# Altium PCB bdcmc25.PcbDoc (part 1 of 4)
Units mil, origin at the board's own origin, x right, y up, seen from the top; angles counter-clockwise.
Board outline 7750 x 2750 mil, 4 copper layers (Layer 1, Layer 2 (GND), Layer 3 (GND), Layer 4), stack 23.756 mil thick; 330 components, 156 nets, 997 pads, 1122 vias.
Unrouted connection lines stored in the file: 39.
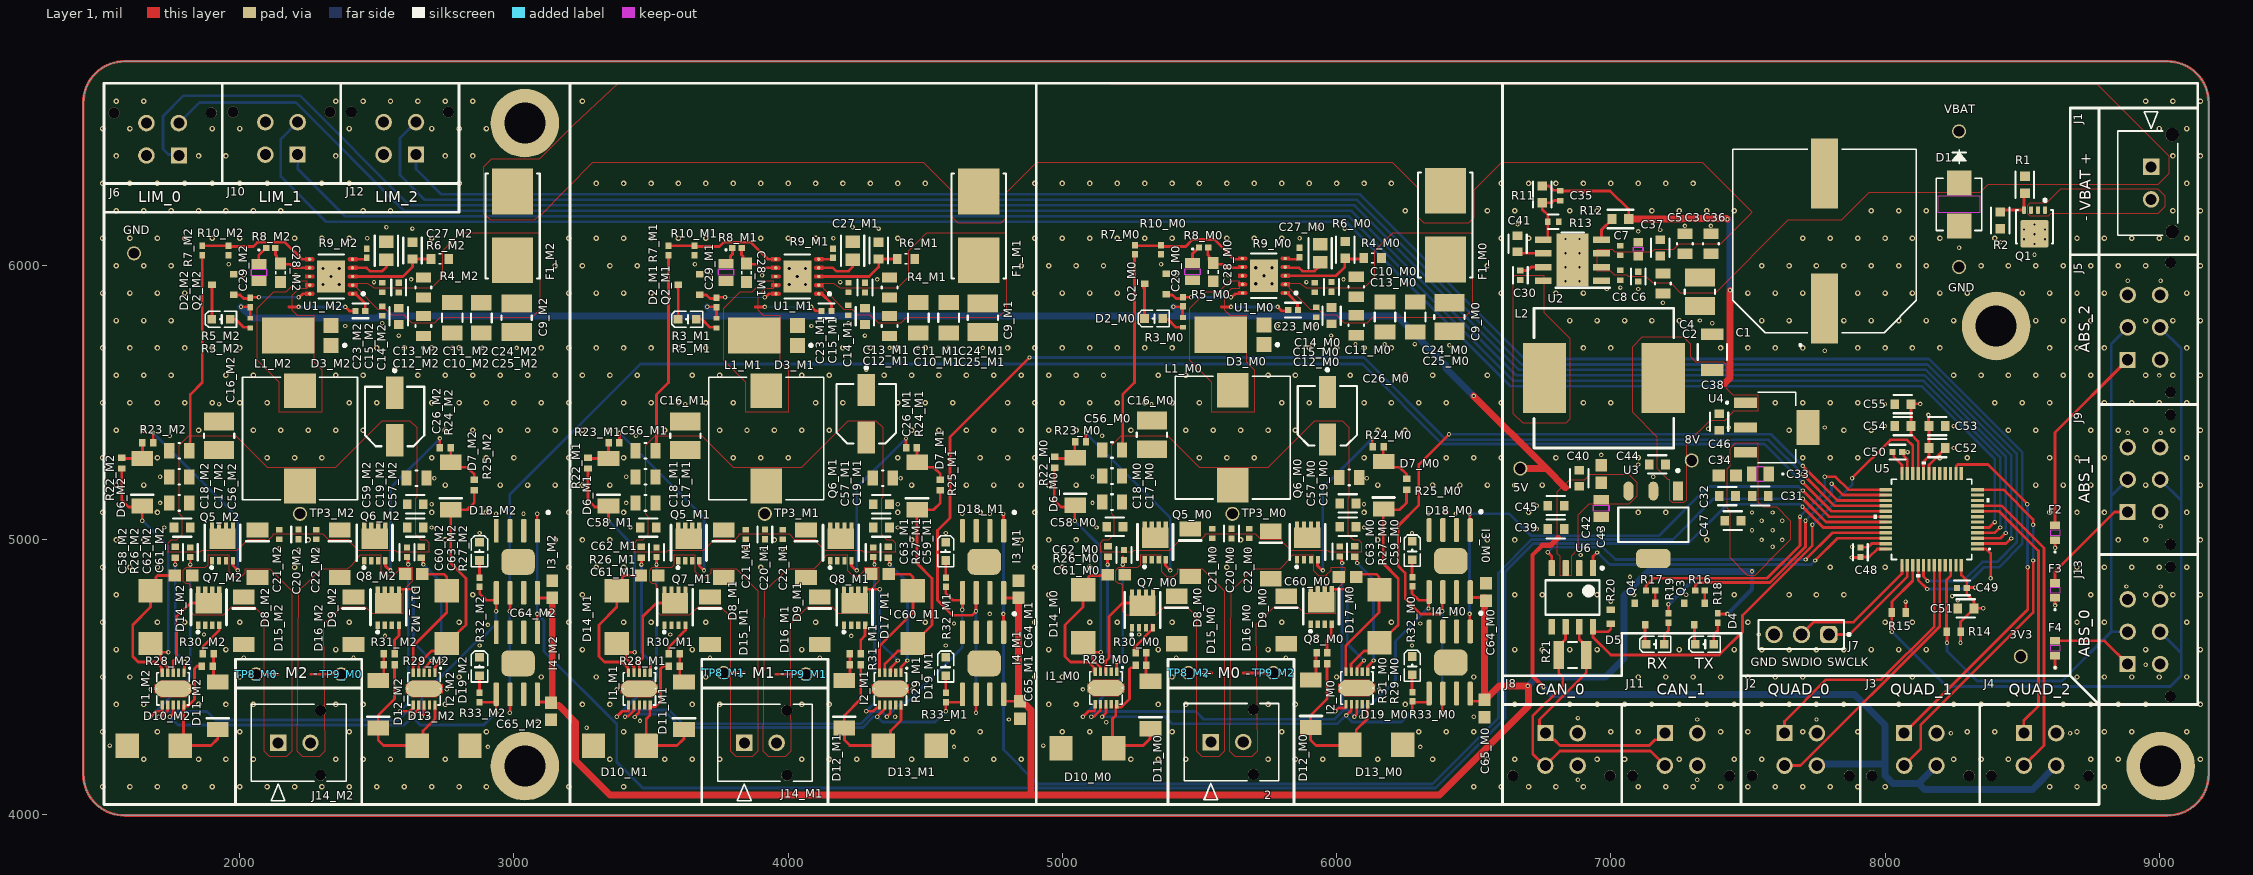
[diagram p0: Layer 1 view]
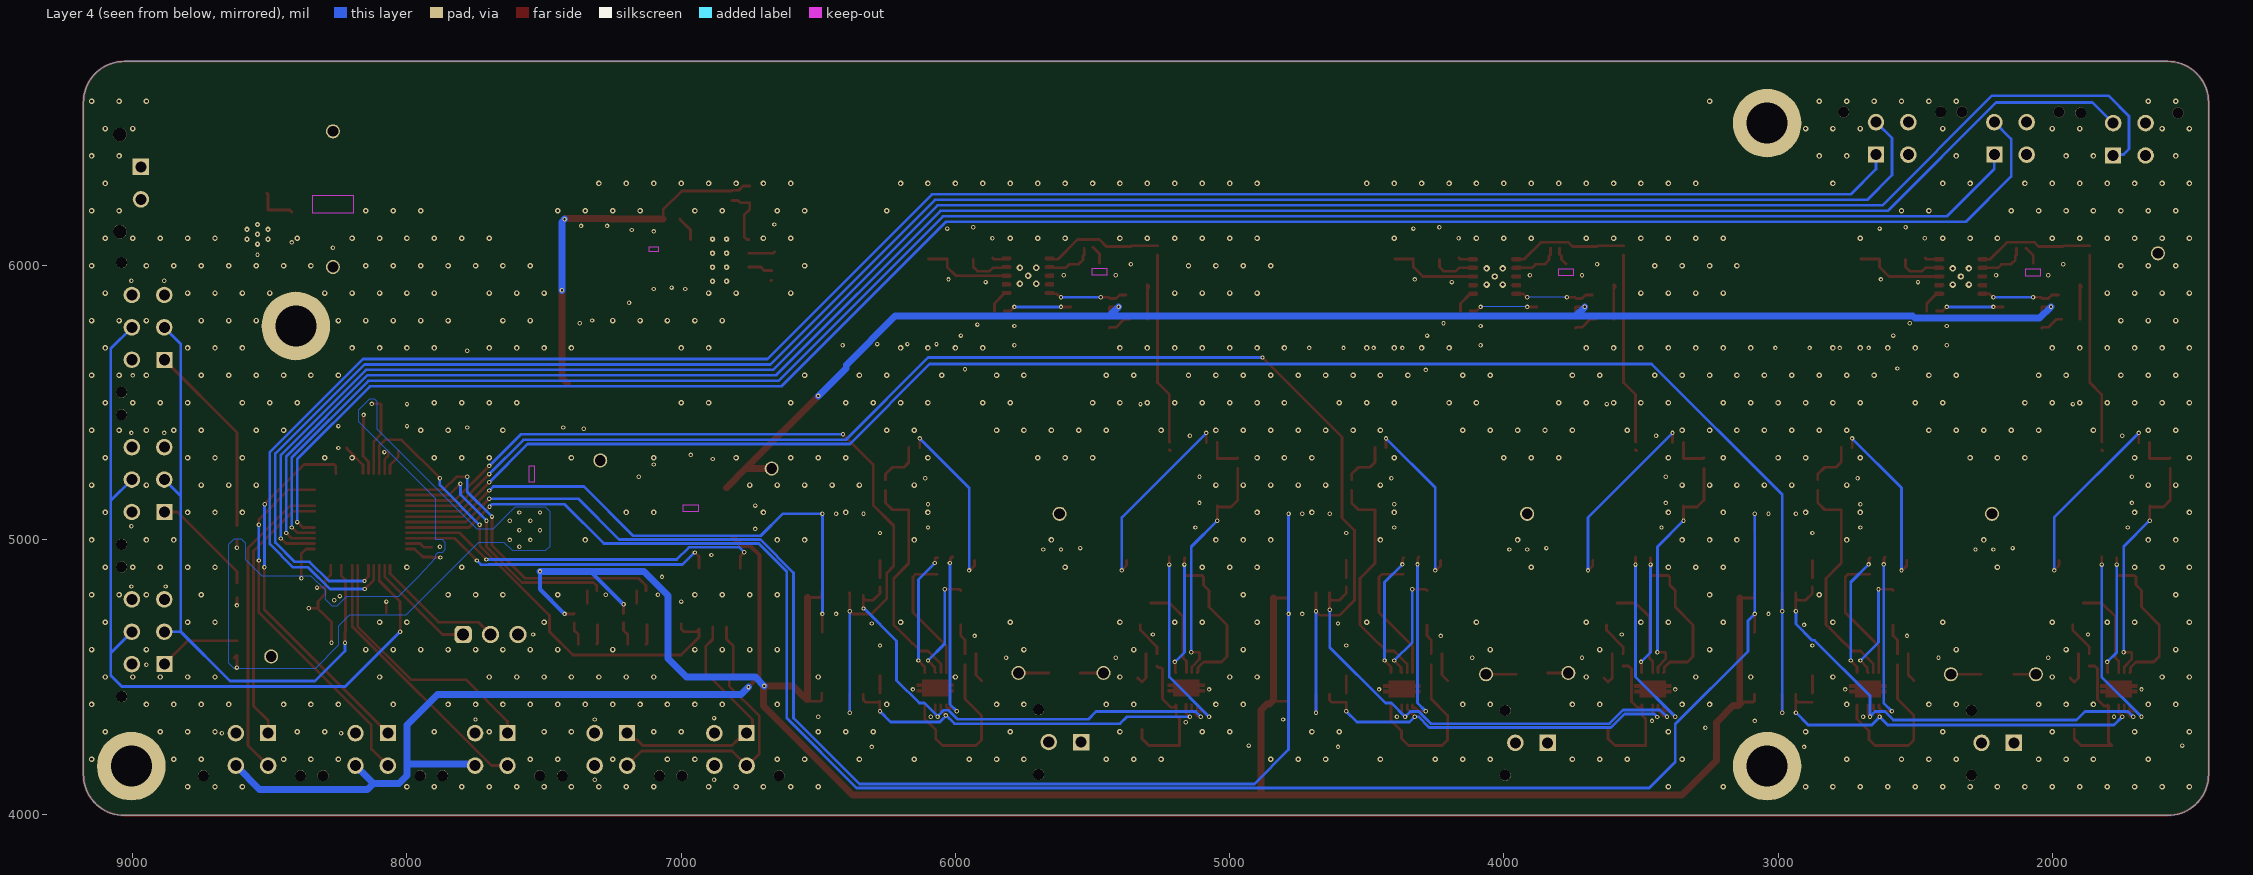
[diagram p1: Layer 4 view, seen from below]
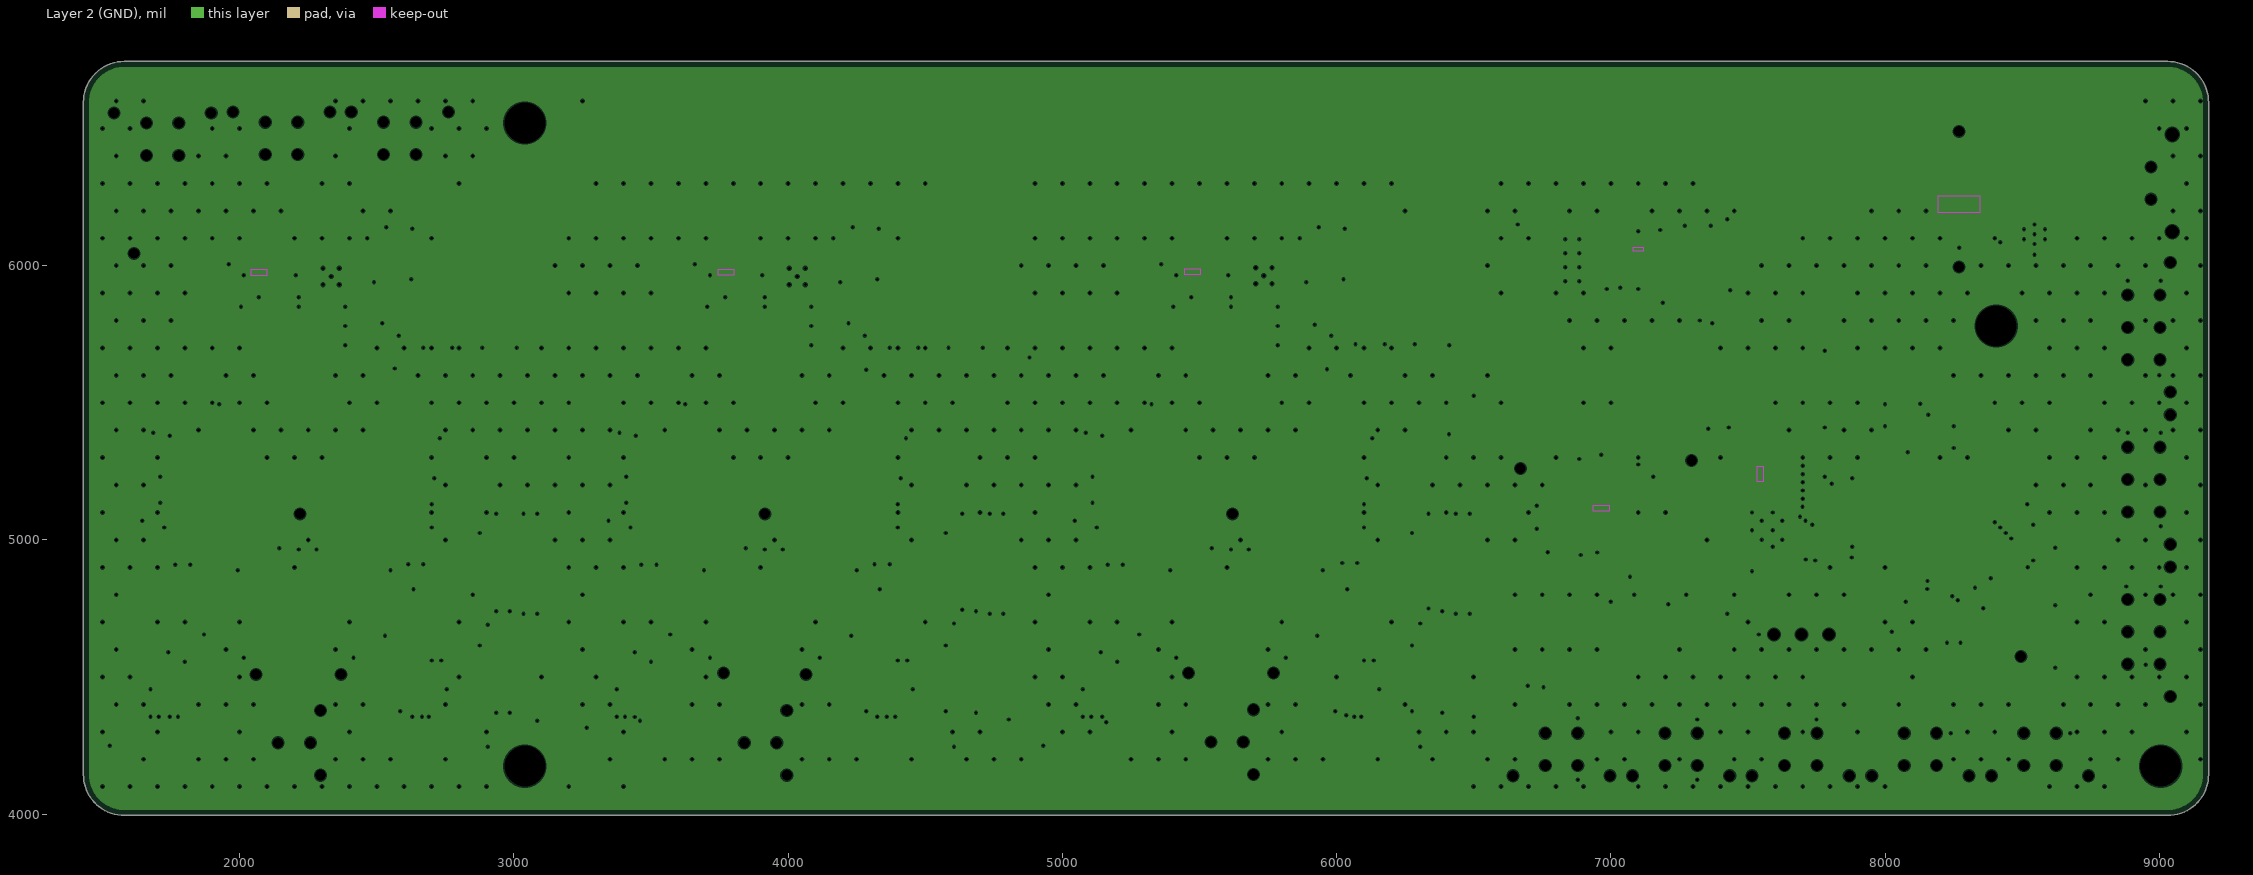
[diagram p2: Layer 2 (GND), clearances drawn from the general rule]
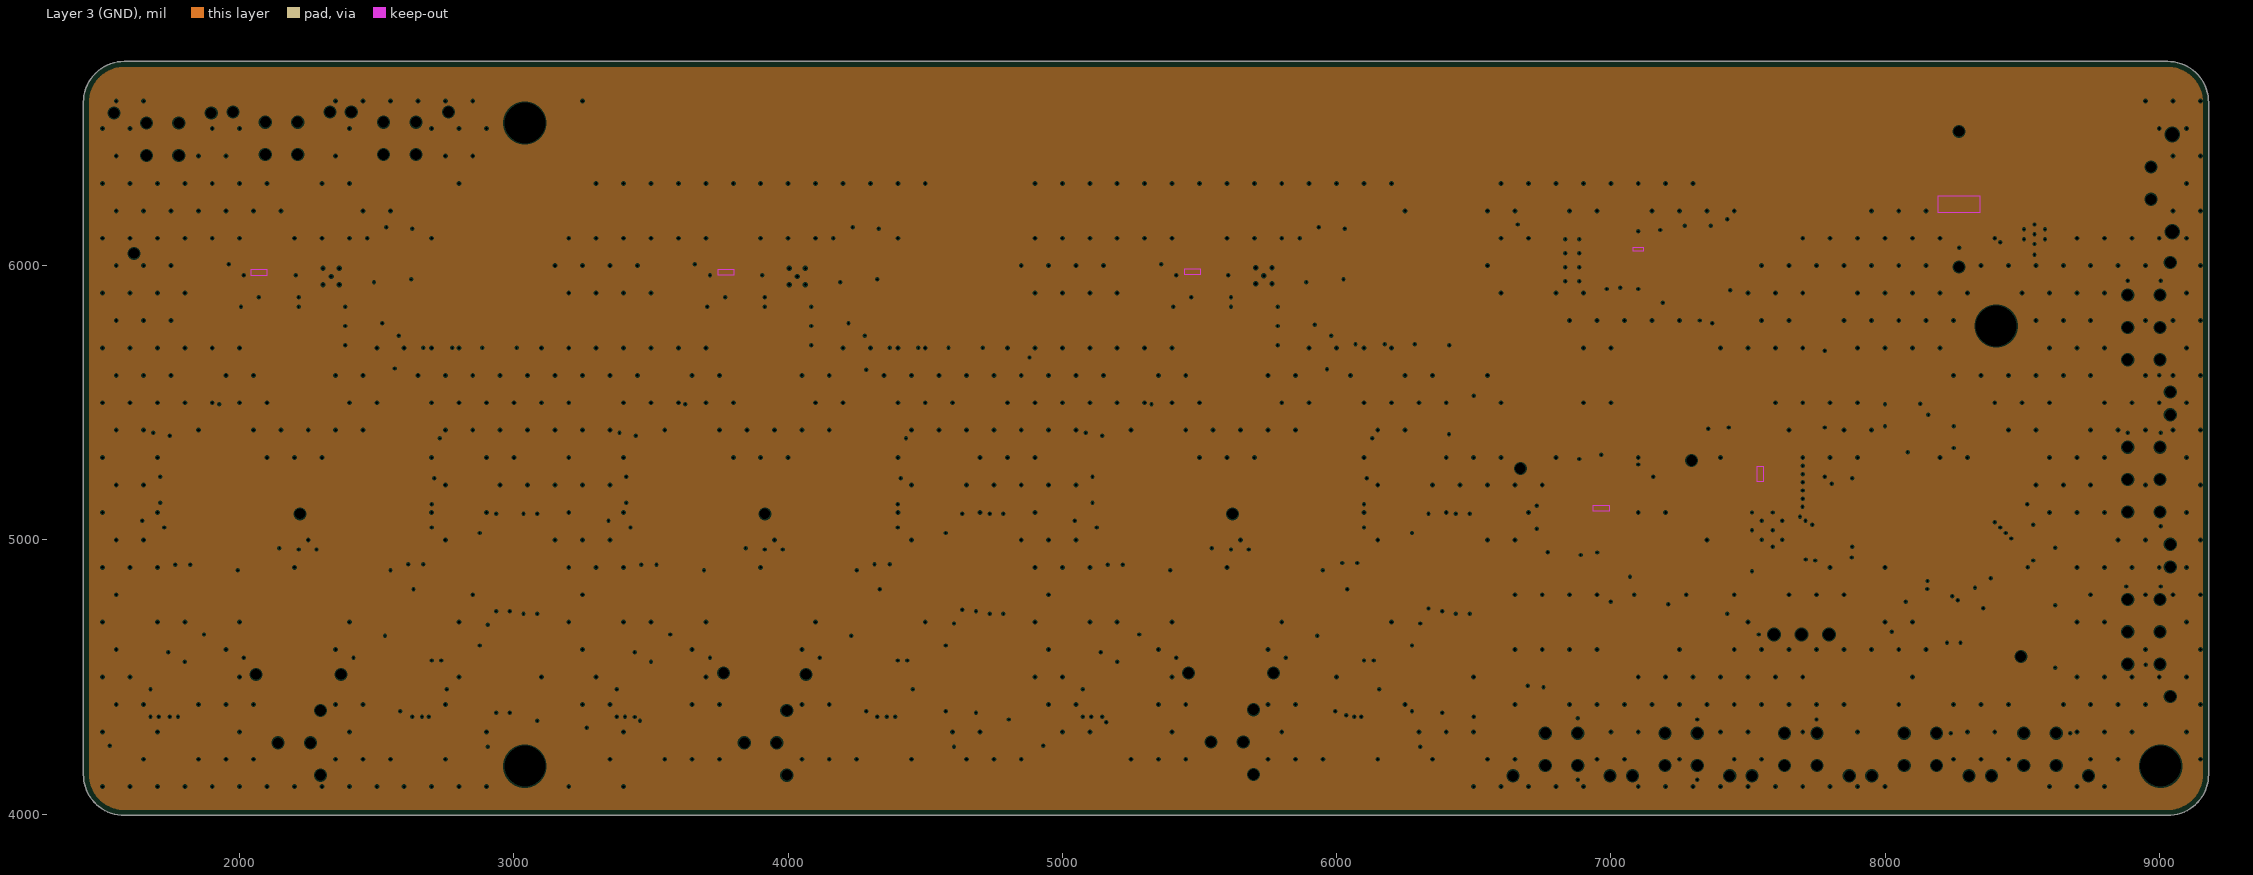
[diagram p3: Layer 3 (GND), clearances drawn from the general rule]
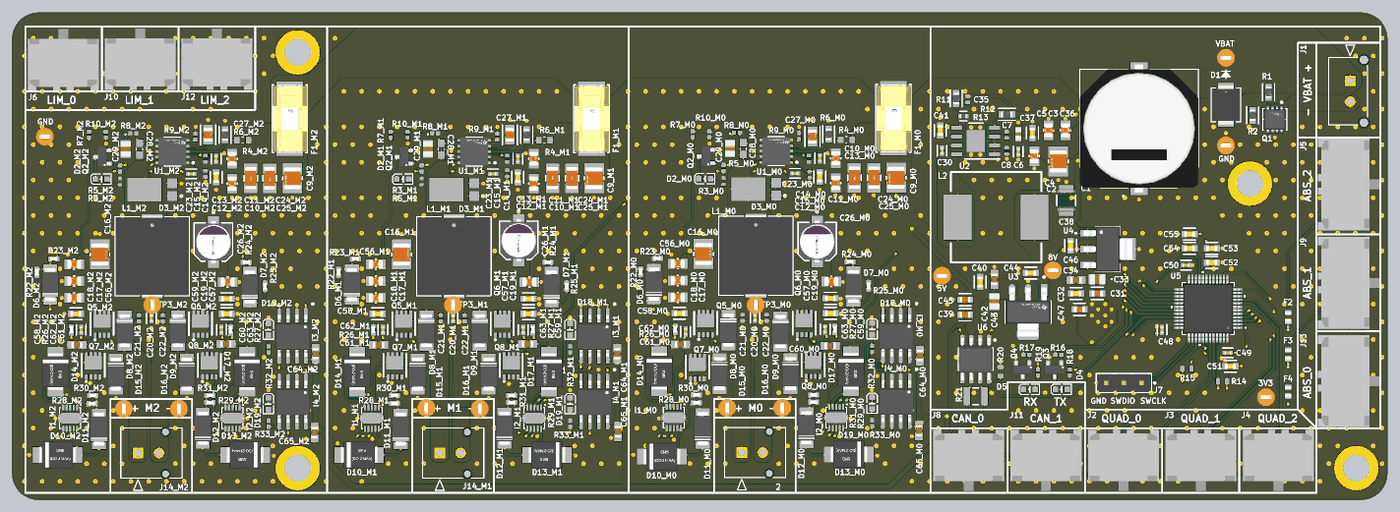
[diagram p6: 3D render of the assembled board from above, using the file's embedded part models]

## Layer stack, top to bottom
Top Solder: solder mask 0.4, Solder Resist, Dk 3.5
Layer 1: signal copper 1.4
Dielectric 2: prepreg 2.8, PP-006, Dk 4.1
Layer 2 (GND): plane copper 1.378
Dielectric 1: dielectric 12.6, FR-4, Dk 4.8
Layer 3 (GND): plane copper 1.378
Dielectric 3: prepreg 2.8, PP-006, Dk 4.1
Layer 4: signal copper 1.4
Bottom Solder: solder mask 0.4, Solder Resist, Dk 3.5

## Board outline
1580,3995 cw(c1580,4145) 1430,4145 1430,6595 cw(c1580,6595) 1580,6745 9030,6745 cw(c9030,6595) 9180,6595 9180,4145 cw(c9030,4145) 9030,3995

## Design rules (kind name [scope] priority, off if disabled: settings)
BoardOutlineClearance [All] p1: gap=7.87 ignorepadtopadclearanceinfootprint=FALSE
Clearance [All] p1: gap=4 ignorepadtopadclearanceinfootprint=FALSE except(5: Arc-Via Track-Via SMDPad-Via THPad-Via Via-Via Via-Fill Via-Poly Via-Region Via-Text; 9.84: Arc-Hole Track-Hole SMDPad-Hole THPad-Hole Via-Hole Fill-Hole Poly-Hole Region-Hole Text-Hole)
ComponentClearance [All] p1: gap=4 collisioncheckmode=3 verticalgap=4 showdistances=TRUE
DiffPairsRouting [All] p1: maxlimit=4 minlimit=4 mostfreqgap=4 toplayer_minwidth=4 toplayer_maxwidth=71497.94 toplayer_prefwidth=4 bottomlayer_minwidth=4 bottomlayer_maxwidth=71497.94 bottomlayer_prefwidth=4 maxuncoupledlength=500
Height [All] p1: minheight=0 maxheight=71497.94 prefheight=500
HoleSize [All] p1: absolutevalues=TRUE maxlimit=248.03 minlimit=7.87 maxpercent=80.000 minpercent=20.000
HoleToHoleClearance [All] p1: gap=9.84 allowstackedmicrovias=FALSE
MinimumAnnularRing [All] p1: minimumring=3
MinimumSolderMaskSliver [All] p1: minsoldermaskwidth=0
PlaneClearance [All] p1: clearance=4
PlaneConnect PlaneConnectPowerPads [InPadClass('PowerPads')] p1: planeconnectstyle=Direct reliefexpansion=20 reliefentries=4 reliefconductorwidth=10 reliefairgap=10
PlaneConnect [All] p2: pad.planeconnectstyle=Relief pad.reliefexpansion=11.81 pad.reliefentries=4 pad.reliefconductorwidth=4 pad.reliefairgap=4 via.planeconnectstyle=Direct via.reliefexpansion=11.81 via.reliefentries=4 via.reliefconductorwidth=5 via.reliefairgap=5
PolygonConnect PolygonConnectPowerPads [All vs (InPadClass('PowerPads'))] p1: connectstyle=Direct reliefconductorwidth=10 reliefentries=4 polygonreliefangle="90 Angle" airgapwidth=10
PolygonConnect [All] p2: thpad.connectstyle=Relief thpad.reliefconductorwidth=4 thpad.reliefentries=4 thpad.polygonreliefangle="90 Angle" thpad.airgapwidth=4 smdpad.connectstyle=Relief smdpad.reliefconductorwidth=4 smdpad.reliefentries=4 smdpad.polygonreliefangle="90 Angle" smdpad.airgapwidth=4 via.connectstyle=Direct via.reliefconductorwidth=5 via.reliefentries=4 via.polygonreliefangle="90 Angle" via.airgapwidth=5
RoutingVias [All] p1: holewidth=7.87 width=17.72 viastyle="Through Hole" minholewidth=7.87 minwidth=17.72 maxholewidth=248.03 maxwidth=257.87
SilkToSilkClearance [All] p1: silktosilkclearance=0
SilkToSolderMaskClearance [IsPad] p1: minsilkscreentomaskgap=4 clearancetoexposedcopper=TRUE
SolderMaskExpansion [All] p1: expansion=2.95 istentingtop=FALSE
Width [All] p1: maxlimit=71497.94 minlimit=10 preferedwidth=10 minimp=50.000000 maximp=50.000000 favimp=50.000000
20 further rules are at their usual default settings.

## Classes and differential pairs
channel class Motor_Control: M0 M1 M2
channel class 12V_Buck_Motor: M0 M1 M2
component class M2: C56_M2 C57_M2 C58_M2 C59_M2 C60_M2 C61_M2 C62_M2 C63_M2 C64_M2 C65_M2 D6_M2 D7_M2 D8_M2 D9_M2 D10_M2 D11_M2 D12_M2 D13_M2 D14_M2 D15_M2 D16_M2 D17_M2 D18_M2 D19_M2 I1_M2 I2_M2 I3_M2 I4_M2 J14_M2 Q5_M2 Q6_M2 Q7_M2 Q8_M2 R22_M2 R23_M2 R24_M2 R25_M2 R26_M2 R27_M2 R28_M2 R29_M2 R30_M2 R31_M2 R32_M2 R33_M2
component class M1: C56_M1 C57_M1 C58_M1 C59_M1 C60_M1 C61_M1 C62_M1 C63_M1 C64_M1 C65_M1 D6_M1 D7_M1 D8_M1 D9_M1 D10_M1 D11_M1 D12_M1 D13_M1 D14_M1 D15_M1 D16_M1 D17_M1 D18_M1 D19_M1 I1_M1 I2_M1 I3_M1 I4_M1 J14_M1 Q5_M1 Q6_M1 Q7_M1 Q8_M1 R22_M1 R23_M1 R24_M1 R25_M1 R26_M1 R27_M1 R28_M1 R29_M1 R30_M1 R31_M1 R32_M1 R33_M1
component class M0: C56_M0 C57_M0 C58_M0 C59_M0 C60_M0 C61_M0 C62_M0 C63_M0 C64_M0 C65_M0 D6_M0 D7_M0 D8_M0 D9_M0 D10_M0 D11_M0 D12_M0 D13_M0 D14_M0 D15_M0 D16_M0 D17_M0 D18_M0 D19_M0 I1_M0 I2_M0 I3_M0 I4_M0 Q5_M0 Q6_M0 Q7_M0 Q8_M0 R22_M0 R23_M0 R24_M0 R25_M0 R26_M0 R27_M0 R28_M0 R29_M0 R30_M0 R31_M0 R32_M0 R33_M0
component class "Input Power": C1 C2 C3 C4 C5 C6 C7 C8 D1 GND J1 Q1 R1 R2 VBAT
component class Designator: C48 C49 C50 C51 C52 C53 C54 C55 D4 D5 F2 F3 F4 GND J2 J3 J4 J5 J6 J7 J8 J9 J10 J11 J12 J13 Q3 Q4 R14 R15 R16 R17 R18 R19 R20 R21 U5 U6

## Components (designator, comment, footprint, x,y, rotation, side; value= is the part's Value field where it differs from the comment)
2 "0430450212" CON_430450212_MOL 5541.51,4262.8 r270 top (schematic designator J14)
3V3 "5003" TEST-POINT-0001 8495,4575 r0 top (schematic designator TP6)
5V "5003" TEST-POINT-0001 6670,5260 r0 top (schematic designator TP5)
8V "5003" TEST-POINT-0001 7295,5290 r0 top (schematic designator TP4)
C1 "EEETK2A101AM" CAP_EEETK2A101AM 7780,6090 r90 top
C2 "CL32B106KBJNNNE" FP-CL32-IPC_B 7325,5905 r270 top
C3 "CC0805KKX7R9BB105" FP-CC0805-0_85-MFG 7270,6080 r270 top value="1 uF"
C4 "CC0805KRX7R9BB104" FP-CC0805-0_85-MFG 7190,5935 r90 top value="100 nF"
C5 "CC0603KPX7R9BB103" FP-CC0603-DA-MFG 7180,6065 r270 top value="10 nF"
C6 "CC0402KRX7R9BB102" FP-CC0402-IPC_B 7100,5960 r90 top value="1.0 nF"
C7 "CC0402JRNPO9BN101" CAPC1005X55N 7035,6055 r270 top
C8 "CC0402JRNPO9BN100" CAPC1005X55N 7035,5965 r90 top
C9_M0 "CL32B106KBJNNNE" FP-CL32-IPC_B 6411.51,5812.8 r270 top (schematic designator C9)
C9_M1 "CL32B106KBJNNNE" FP-CL32-IPC_B 4710.12,5810 r270 top (schematic designator C9)
C9_M2 "CL32B106KBJNNNE" FP-CL32-IPC_B 3010,5810 r270 top (schematic designator C9)
C10_M0 "CC0805KKX7R9BB105" FP-CC0805-0_85-MFG 6071.51,5922.8 r270 top value="1 uF" (schematic designator C10)
C10_M1 "CC0805KKX7R9BB105" FP-CC0805-0_85-MFG 4370.12,5920 r270 top value="1 uF" (schematic designator C10)
C10_M2 "CC0805KKX7R9BB105" FP-CC0805-0_85-MFG 2670,5920 r270 top value="1 uF" (schematic designator C10)
C11_M0 "CC0805KRX7R9BB104" FP-CC0805-0_85-MFG 6071.51,5782.8 r90 top value="100 nF" (schematic designator C11)
C11_M1 "CC0805KRX7R9BB104" FP-CC0805-0_85-MFG 4370.12,5780 r90 top value="100 nF" (schematic designator C11)
C11_M2 "CC0805KRX7R9BB104" FP-CC0805-0_85-MFG 2670,5780 r90 top value="100 nF" (schematic designator C11)
C12_M0 "CC0603KPX7R9BB103" FP-CC0603-DA-MFG 5981.51,5817.8 r90 top value="10 nF" (schematic designator C12)
C12_M1 "CC0603KPX7R9BB103" FP-CC0603-DA-MFG 4280.12,5815 r90 top value="10 nF" (schematic designator C12)
C12_M2 "CC0603KPX7R9BB103" FP-CC0603-DA-MFG 2580,5815 r90 top value="10 nF" (schematic designator C12)
C13_M0 "CC0402KRX7R9BB102" FP-CC0402-IPC_B 5981.51,5922.8 r270 top value="1.0 nF" (schematic designator C13)
C13_M1 "CC0402KRX7R9BB102" FP-CC0402-IPC_B 4280.12,5920 r270 top value="1.0 nF" (schematic designator C13)
C13_M2 "CC0402KRX7R9BB102" FP-CC0402-IPC_B 2580,5920 r270 top value="1.0 nF" (schematic designator C13)
C14_M0 "CC0402JRNPO9BN101" CAPC1005X55N 5925,5830 r90 top (schematic designator C14)
C14_M1 "CC0402JRNPO9BN101" CAPC1005X55N 4220,5837.48 r90 top (schematic designator C14)
C14_M2 "CC0402JRNPO9BN101" CAPC1005X55N 2520,5835 r90 top (schematic designator C14)
C15_M0 "CC0402JRNPO9BN100" CAPC1005X55N 5920,5920 r270 top (schematic designator C15)
C15_M1 "CC0402JRNPO9BN100" CAPC1005X55N 4220.12,5920 r270 top (schematic designator C15)
C15_M2 "CC0402JRNPO9BN100" CAPC1005X55N 2520,5920 r270 top (schematic designator C15)
C16_M0 "CL32B106KBJNNNE" FP-CL32-IPC_B 5326.51,5382.8 r90 top (schematic designator C16)
C16_M1 "CL32B106KBJNNNE" FP-CL32-IPC_B 3625.12,5380 r90 top (schematic designator C16)
C16_M2 "CL32B106KBJNNNE" FP-CL32-IPC_B 1925,5380 r90 top (schematic designator C16)
C17_M0 "CC0805KKX7R9BB105" FP-CC0805-0_85-MFG 5181.51,5232.8 r0 top value="1 uF" (schematic designator C17)
C17_M1 "CC0805KKX7R9BB105" FP-CC0805-0_85-MFG 3480.12,5230 r0 top value="1 uF" (schematic designator C17)
C17_M2 "CC0805KKX7R9BB105" FP-CC0805-0_85-MFG 1780,5230 r0 top value="1 uF" (schematic designator C17)
C18_M0 "CC0805KRX7R9BB104" FP-CC0805-0_85-MFG 5181.51,5137.8 r0 top value="100 nF" (schematic designator C18)
C18_M1 "CC0805KRX7R9BB104" FP-CC0805-0_85-MFG 3480.12,5135 r0 top value="100 nF" (schematic designator C18)
C18_M2 "CC0805KRX7R9BB104" FP-CC0805-0_85-MFG 1780,5135 r0 top value="100 nF" (schematic designator C18)
C19_M0 "CC0603KPX7R9BB103" FP-CC0603-DA-MFG 6041.51,5132.8 r180 top value="10 nF" (schematic designator C19)
C19_M1 "CC0603KPX7R9BB103" FP-CC0603-DA-MFG 4340.12,5130 r180 top value="10 nF" (schematic designator C19)
C19_M2 "CC0603KPX7R9BB103" FP-CC0603-DA-MFG 2640,5130 r180 top value="10 nF" (schematic designator C19)
C20_M0 "CC0402KRX7R9BB102" FP-CC0402-IPC_B 5616.51,5022.8 r90 top value="1.0 nF" (schematic designator C20)
C20_M1 "CC0402KRX7R9BB102" FP-CC0402-IPC_B 3915.12,5020 r90 top value="1.0 nF" (schematic designator C20)
C20_M2 "CC0402KRX7R9BB102" FP-CC0402-IPC_B 2215,5020 r90 top value="1.0 nF" (schematic designator C20)
C21_M0 "CC0402JRNPO9BN101" CAPC1005X55N 5546.51,5022.8 r90 top (schematic designator C21)
C21_M1 "CC0402JRNPO9BN101" CAPC1005X55N 3845.12,5020 r90 top (schematic designator C21)
C21_M2 "CC0402JRNPO9BN101" CAPC1005X55N 2145,5020 r90 top (schematic designator C21)
C22_M0 "CC0402JRNPO9BN100" CAPC1005X55N 5681.51,5022.8 r90 top (schematic designator C22)
C22_M1 "CC0402JRNPO9BN100" CAPC1005X55N 3980.12,5020 r90 top (schematic designator C22)
C22_M2 "CC0402JRNPO9BN100" CAPC1005X55N 2280,5020 r90 top (schematic designator C22)
C23_M0 "CC0402KRX7R7BB104" FP-CC0402-IPC_B 5841.51,5837.8 r180 top value="100 nF" (schematic designator C23)
C23_M1 "CC0402KRX7R7BB104" FP-CC0402-IPC_B 4140.12,5835 r180 top value="100 nF" (schematic designator C23)
C23_M2 "CC0402KRX7R7BB104" FP-CC0402-IPC_B 2440,5835 r180 top value="100 nF" (schematic designator C23)
C24_M0 "CC1206KKX7R0BB225" FP-CC1206-0_3-1_9-IPC_B 6286.51,5812.8 r270 top (schematic designator C24)
C24_M1 "CC1206KKX7R0BB225" FP-CC1206-0_3-1_9-IPC_B 4585.12,5810 r270 top (schematic designator C24)
C24_M2 "CC1206KKX7R0BB225" FP-CC1206-0_3-1_9-IPC_B 2881.51,5809.53 r270 top (schematic designator C24)
C25_M0 "CC1206KKX7R0BB225" FP-CC1206-0_3-1_9-IPC_B 6176.51,5812.8 r270 top (schematic designator C25)
C25_M1 "CC1206KKX7R0BB225" FP-CC1206-0_3-1_9-IPC_B 4475.12,5810 r270 top (schematic designator C25)
C25_M2 "CC1206KKX7R0BB225" FP-CC1206-0_3-1_9-IPC_B 2775,5810 r270 top (schematic designator C25)
C26_M0 "16SVPG47M" FP-OS-CON-SMT-B45-MFG 5966.51,5452.8 r270 top (schematic designator C26)
C26_M1 "16SVPG47M" FP-OS-CON-SMT-B45-MFG 4285,5460 r270 top (schematic designator C26)
C26_M2 "16SVPG47M" FP-OS-CON-SMT-B45-MFG 2565,5450 r270 top (schematic designator C26)
C27_M0 "GRM2165C1H272JA01D" FP-GRM216-0_1-IPC_B 5940,6045 r90 top (schematic designator C27)
C27_M1 "GRM2165C1H272JA01D" FP-GRM216-0_1-IPC_B 4235.12,6055 r90 top (schematic designator C27)
C27_M2 "GRM2165C1H272JA01D" FP-GRM216-0_1-IPC_B 2535,6055 r90 top (schematic designator C27)
C28_M0 "CC0603CRNPO0BN6R8" CAPC1608X90 5550,5976.73 r270 top (schematic designator C28)
C28_M1 "CC0603CRNPO0BN6R8" CAPC1608X90 3848.61,5973.94 r270 top (schematic designator C28)
C28_M2 "CC0603CRNPO0BN6R8" CAPC1608X90 2148.49,5973.94 r270 top (schematic designator C28)
C29_M0 "CC0805JRNPO9BN471" CAP_CC0805_YAG-L 5475,5978.27 r270 top (schematic designator C29)
C29_M1 "CC0805JRNPO9BN471" CAP_CC0805_YAG-L 3773.61,5975.47 r270 top (schematic designator C29)
C29_M2 "CC0805JRNPO9BN471" CAP_CC0805_YAG-L 2070,5975 r270 top (schematic designator C29)
C30 "CC0402KRX7R7BB104" FP-CC0402-IPC_B 6670,5965 r270 top value="100 nF"
C31 "CC0603KRX5R6BB106" FP-CC0603-DC-MFG 7545,5160 r0 top
C32 "CC0603KRX7R7BB105" FP-CC0603-DA-MFG 7425,5160 r180 top
C33 "CC0805JRNPO9BN471" CAP_CC0805_YAG-L 7545,5240 r180 top
C34 "CC0603KRX7R0BB104" CAP-0603 7425,5235 r0 top
C35 "CC0402CRNPO9BN5R1" CAPC1005X55N 6815,6255 r270 top
C36 "CC0805KKX5R9BB475" FP-CC0805-0_85-MFG 7365,6080 r90 top value="4.7 uF"
C37 "CC0603JRX7R9BB224" CAP_CC0603_YAG 7100,6060 r90 top
C38 "GRM32ER61E226KE15L" FP-GRM32-MFG 7370,5685 r90 top value=22uF
C39 "CC0603KRX5R6BB106" FP-CC0603-DC-MFG 6800,5040 r180 top
C40 "CC0603KRX7R7BB105" FP-CC0603-DA-MFG 6885,5225 r90 top
C41 "CC0603KRX7R7BB105" FP-CC0603-DA-MFG 6660,6080 r90 top
C42 "CC0805JRNPO9BN471" CAP_CC0805_YAG-L 6965,5115 r90 top
C43 "CC0603KRX7R0BB104" CAP-0603 6965,5240 r270 top
C44 "CC0603KRX7R8BB334" FP-CC0603-DA-MFG 7170,5275 r180 top
C45 "CC0603KRX5R6BB106" FP-CC0603-DC-MFG 6800,5125 r180 top
C46 "CC0603KRX7R8BB334" FP-CC0603-DA-MFG 7395,5430 r270 top
C47 "CC0603KRX5R6BB106" FP-CC0603-DC-MFG 7445,5070 r180 top
C48 "CC0402KRX7R7BB104" FP-CC0402-IPC_B 7910,4955 r270 top value="100 nF"
C49 "CC0402KRX7R7BB104" FP-CC0402-IPC_B 8280,4825 r0 top value="100 nF"
C50 "CC0402KRX7R7BB104" FP-CC0402-IPC_B 8045,5320 r180 top value="100 nF"
C51 "CC0603KRX5R8BB475" FP-CC0603-DA-MFG 8295,4750 r0 top
C52 "CC0603KPX7R9BB103" FP-CC0603-DA-MFG 8190,5335 r180 top value="10 nF"
C53 "CC0603KRX7R7BB105" FP-CC0603-DA-MFG 8190,5415 r180 top
C54 "CC0603KPX7R9BB103" FP-CC0603-DA-MFG 8065,5415 r0 top value="10 nF"
C55 "CC0603KRX7R7BB105" FP-CC0603-DA-MFG 8065,5495 r0 top
C56_M0 "CC0805KKX7R9BB105" FP-CC0805-0_85-MFG 5181.51,5327.8 r0 top value="1 uF" (schematic designator C56)
C56_M1 "CC0805KKX7R9BB105" FP-CC0805-0_85-MFG 3480.12,5325 r0 top value="1 uF" (schematic designator C56)
C56_M2 "CC0805KKX7R9BB105" FP-CC0805-0_85-MFG 1780,5325 r0 top value="1 uF" (schematic designator C56)
C57_M0 "CC0805KKX7R9BB105" FP-CC0805-0_85-MFG 6046.51,5227.8 r180 top value="1 uF" (schematic designator C57)
C57_M1 "CC0805KKX7R9BB105" FP-CC0805-0_85-MFG 4345.12,5225 r180 top value="1 uF" (schematic designator C57)
C57_M2 "CC0805KKX7R9BB105" FP-CC0805-0_85-MFG 2645,5225 r180 top value="1 uF" (schematic designator C57)
C58_M0 "CC0603KPX7R9BB103" FP-CC0603-DA-MFG 5191.51,5047.8 r0 top value="10 nF" (schematic designator C58)
C58_M1 "CC0603KPX7R9BB103" FP-CC0603-DA-MFG 3490.12,5045 r0 top value="10 nF" (schematic designator C58)
C58_M2 "CC0603KPX7R9BB103" FP-CC0603-DA-MFG 1790,5045 r0 top value="10 nF" (schematic designator C58)
C59_M0 "CC0603KPX7R9BB103" FP-CC0603-DA-MFG 6041.51,5047.8 r180 top value="10 nF" (schematic designator C59)
C59_M1 "CC0603KPX7R9BB103" FP-CC0603-DA-MFG 4340.12,5045 r180 top value="10 nF" (schematic designator C59)
C59_M2 "CC0603KPX7R9BB103" FP-CC0603-DA-MFG 2640,5045 r180 top value="10 nF" (schematic designator C59)
C60_M0 "CC0603KRX7R0BB104" CAP-0603 6040,4865 r0 top (schematic designator C60)
C60_M1 "CC0603KRX7R0BB104" CAP-0603 4335.12,4875 r0 top (schematic designator C60)
C60_M2 "CC0603KRX7R0BB104" CAP-0603 2635,4875 r0 top (schematic designator C60)
C61_M0 "CC0603KRX7R0BB104" CAP-0603 5196.51,4872.8 r180 top (schematic designator C61)
C61_M1 "CC0603KRX7R0BB104" CAP-0603 3495.12,4870 r180 top (schematic designator C61)
C61_M2 "CC0603KRX7R0BB104" CAP-0603 1795,4870 r180 top (schematic designator C61)
C62_M0 "CC0402KRX7R9BB102" FP-CC0402-IPC_B 5225,4945 r270 top value="1.0 nF" (schematic designator C62)
C62_M1 "CC0402KRX7R9BB102" FP-CC0402-IPC_B 3520.12,4955 r270 top value="1.0 nF" (schematic designator C62)
C62_M2 "CC0402KRX7R9BB102" FP-CC0402-IPC_B 1820,4955 r270 top value="1.0 nF" (schematic designator C62)
C63_M0 "CC0402KRX7R9BB102" FP-CC0402-IPC_B 6011.51,4957.8 r270 top value="1.0 nF" (schematic designator C63)
C63_M1 "CC0402KRX7R9BB102" FP-CC0402-IPC_B 4310.12,4955 r270 top value="1.0 nF" (schematic designator C63)
C63_M2 "CC0402KRX7R9BB102" FP-CC0402-IPC_B 2610,4955 r270 top value="1.0 nF" (schematic designator C63)
C64_M0 "CC0603KRX7R0BB104" CAP-0603 6545,4810 r90 top (schematic designator C64)
C64_M1 "CC0603KRX7R0BB104" CAP-0603 4840.12,4820 r90 top (schematic designator C64)
C64_M2 "CC0603KRX7R0BB104" CAP-0603 3140,4820 r90 top (schematic designator C64)
C65_M0 "CC0603KRX7R0BB104" CAP-0603 6540,4385 r270 top (schematic designator C65)
C65_M1 "CC0603KRX7R0BB104" CAP-0603 4845,4380 r270 top (schematic designator C65)
C65_M2 "CC0603KRX7R0BB104" CAP-0603 3135,4375 r270 top (schematic designator C65)
D1 "SMBJ40CA" SMB 8270,6223.5 r270 top
D2_M0 "BL-HKC36G-AV-TRB" LED0603-R-RD 5276.51,5777.8 r0 top (schematic designator D2)
D2_M1 "BL-HKC36G-AV-TRB" LED0603-R-RD 3575.12,5775 r0 top (schematic designator D2)
D2_M2 "BL-HKC36G-AV-TRB" LED0603-R-RD 1875,5775 r0 top (schematic designator D2)
D3_M0 "PDS760-13" DIOD-POWERDI5-3_V 5622.56,5748.27 r180 top (schematic designator D3)
D3_M1 "PDS760-13" DIOD-POWERDI5-3_V 3921.17,5745.47 r180 top (schematic designator D3)
D3_M2 "PDS760-13" DIOD-POWERDI5-3_V 2221.05,5745.47 r180 top (schematic designator D3)
D4 "BL-HKC36G-AV-TRB" LED0603-R-RD 7285,4590 r0 top
D5 "BL-HKC36G-AV-TRB" LED0603-R-RD 7105,4590 r0 top
D6_M0 "PMEG6030EP,115" DIO-SOD128 5046.51,5212.8 r0 top (schematic designator D6)
D6_M1 "PMEG6030EP,115" DIO-SOD128 3345.12,5210 r0 top (schematic designator D6)
D6_M2 "PMEG6030EP,115" DIO-SOD128 1645,5210 r0 top (schematic designator D6)
D7_M0 "PMEG6030EP,115" DIO-SOD128 6171.51,5199.41 r0 top (schematic designator D7)
D7_M1 "PMEG6030EP,115" DIO-SOD128 4470.12,5196.61 r0 top (schematic designator D7)
D7_M2 "PMEG6030EP,115" DIO-SOD128 2770,5196.61 r0 top (schematic designator D7)
D8_M0 "PMEG6030EP,115" DIO-SOD128 5466.51,4952.8 r180 top (schematic designator D8)
D8_M1 "PMEG6030EP,115" DIO-SOD128 3765.12,4950 r180 top (schematic designator D8)
D8_M2 "PMEG6030EP,115" DIO-SOD128 2065,4950 r180 top (schematic designator D8)
D9_M0 "PMEG6030EP,115" DIO-SOD128 5760,4945 r180 top (schematic designator D9)
D9_M1 "PMEG6030EP,115" DIO-SOD128 4065.12,4950 r180 top (schematic designator D9)
D9_M2 "PMEG6030EP,115" DIO-SOD128 2365,4950 r180 top (schematic designator D9)
D10_M0 "SMBJ12CA" "DO-214AA (SMBJ)" 5090,4240 r0 top (schematic designator D10)
D10_M1 "SMBJ12CA" "DO-214AA (SMBJ)" 3385.12,4250 r0 top (schematic designator D10)
D10_M2 "SMBJ12CA" "DO-214AA (SMBJ)" 1685,4250 r0 top (schematic designator D10)
D11_M0 "PMEG6030EP,115" DIO-SOD128 5321.51,4397.8 r0 top (schematic designator D11)
D11_M1 "PMEG6030EP,115" DIO-SOD128 3620.12,4395 r0 top (schematic designator D11)
D11_M2 "PMEG6030EP,115" DIO-SOD128 1920,4395 r0 top (schematic designator D11)
D12_M0 "PMEG6030EP,115" DIO-SOD128 5906.51,4402.8 r0 top (schematic designator D12)
D12_M1 "PMEG6030EP,115" DIO-SOD128 4205.12,4400 r0 top (schematic designator D12)
D12_M2 "PMEG6030EP,115" DIO-SOD128 2505,4400 r0 top (schematic designator D12)
D13_M0 "SMBJ12CA" "DO-214AA (SMBJ)" 6146.51,4252.8 r180 top (schematic designator D13)
D13_M1 "SMBJ12CA" "DO-214AA (SMBJ)" 4445.12,4250 r180 top (schematic designator D13)
D13_M2 "SMBJ12CA" "DO-214AA (SMBJ)" 2745,4250 r180 top (schematic designator D13)
D14_M0 "SMBJ12CA" "DO-214AA (SMBJ)" 5076.51,4722.8 r270 top (schematic designator D14)
D14_M1 "SMBJ12CA" "DO-214AA (SMBJ)" 3375.12,4720 r270 top (schematic designator D14)
D14_M2 "SMBJ12CA" "DO-214AA (SMBJ)" 1675,4720 r270 top (schematic designator D14)
D15_M0 "PMEG6030EP,115" DIO-SOD128 5416.51,4707.8 r180 top (schematic designator D15)
D15_M1 "PMEG6030EP,115" DIO-SOD128 3715.12,4705 r180 top (schematic designator D15)
D15_M2 "PMEG6030EP,115" DIO-SOD128 2015,4705 r180 top (schematic designator D15)
D16_M0 "PMEG6030EP,115" DIO-SOD128 5816.51,4707.8 r180 top (schematic designator D16)
D16_M1 "PMEG6030EP,115" DIO-SOD128 4115.12,4705 r180 top (schematic designator D16)
D16_M2 "PMEG6030EP,115" DIO-SOD128 2415,4705 r180 top (schematic designator D16)
D17_M0 "SMBJ12CA" "DO-214AA (SMBJ)" 6156.51,4722.8 r270 top (schematic designator D17)
D17_M1 "SMBJ12CA" "DO-214AA (SMBJ)" 4455.12,4720 r270 top (schematic designator D17)
D17_M2 "SMBJ12CA" "DO-214AA (SMBJ)" 2755,4720 r270 top (schematic designator D17)
D18_M0 "BL-HKC36G-AV-TRB" LED0603-R-RD 6246.51,5017.8 r270 top (schematic designator D18)
D18_M1 "BL-HKC36G-AV-TRB" LED0603-R-RD 4545.12,5015 r270 top (schematic designator D18)
D18_M2 "BL-HKC36G-AV-TRB" LED0603-R-RD 2845,5015 r270 top (schematic designator D18)
D19_M0 "BL-HKC36G-AV-TRB" LED0603-R-RD 6246.51,4597.8 r270 top (schematic designator D19)
D19_M1 "BL-HKC36G-AV-TRB" LED0603-R-RD 4545.12,4595 r270 top (schematic designator D19)
D19_M2 "BL-HKC36G-AV-TRB" LED0603-R-RD 2845,4595 r270 top (schematic designator D19)
F1_M0 "01550900M" FP-0155-MFG 6396.51,6147.8 r270 top (schematic designator F1)
F1_M1 "01550900M" FP-0155-MFG 4695.12,6145 r270 top (schematic designator F1)
F1_M2 "01550900M" FP-0155-MFG 2995,6145 r270 top (schematic designator F1)
F2 "MFU0603FF01000P500" FUS_VISHAY_MFU0603_VIS 8620,5026 r90 top
F3 "MFU0603FF01000P500" FUS_VISHAY_MFU0603_VIS 8620,4816 r90 top
F4 "MFU0603FF01000P500" FUS_VISHAY_MFU0603_VIS 8620,4605 r90 top
GND "5003" TEST-POINT-0001 1615,6045 r0 top (schematic designator TP7)
GND "5003" TEST-POINT-0001 8270,5995 r0 top (schematic designator TP2)
I1_M0 "UCC27282DRCR" IC-10POWERSOIC 5216.51,4532.8 r270 top (schematic designator I1)
I1_M1 "UCC27282DRCR" IC-10POWERSOIC 3515.12,4530 r270 top (schematic designator I1)
I1_M2 "UCC27282DRCR" IC-10POWERSOIC 1815,4530 r270 top (schematic designator I1)
I2_M0 "UCC27282DRCR" IC-10POWERSOIC 6131.51,4532.8 r270 top (schematic designator I2)
I2_M1 "UCC27282DRCR" IC-10POWERSOIC 4430.12,4530 r270 top (schematic designator I2)
I2_M2 "UCC27282DRCR" IC-10POWERSOIC 2730,4530 r270 top (schematic designator I2)
I3_M0 "SN74LVC2G157DCUR" IC-8PowerSOIC 6416.51,4922.8 r180 top (schematic designator I3)
I3_M1 "SN74LVC2G157DCUR" IC-8PowerSOIC 4715.12,4920 r180 top (schematic designator I3)
I3_M2 "SN74LVC2G157DCUR" IC-8PowerSOIC 3015,4920 r180 top (schematic designator I3)
I4_M0 "SN74LVC2G157DCUR" IC-8PowerSOIC 6416.51,4552.8 r180 top (schematic designator I4)
I4_M1 "SN74LVC2G157DCUR" IC-8PowerSOIC 4715,4550 r180 top (schematic designator I4)
I4_M2 "SN74LVC2G157DCUR" IC-8PowerSOIC 3015,4550 r180 top (schematic designator I4)
J1 "CONN-BATT-0001" CON_436500215_MOL 8970,6360 r90 top
J2 "Molex 43045-0412" 43045-0412 7692.5,4295 r180 top
J3 "Molex 43045-0412" 43045-0412 8128.75,4295 r180 top
J4 "Molex 43045-0412" 43045-0412 8565,4295 r180 top
J5 "Molex 43045-0612" 43045-0612 8885,5775 r270 top
J6 "Molex 43045-0412" 43045-0412 1719.06,6401.89 r0 top
J7 "61300311121" 61300311121 7695,4655 r180 top
J8 "Molex 43045-0412" 43045-0412 6820,4295 r180 top
J9 "Molex 43045-0612" 43045-0612 8885,5220 r270 top
J10 "Molex 43045-0412" 43045-0412 2152.5,6405 r0 top
J11 "Molex 43045-0412" 43045-0412 7256.25,4295 r180 top
J12 "Molex 43045-0412" 43045-0412 2584.06,6405 r0 top
J13 "Molex 43045-0612" 43045-0612 8885,4665 r270 top
J14_M1 "0430450212" CON_430450212_MOL 3840.12,4260 r270 top (schematic designator J14)
J14_M2 "0430450212" CON_430450212_MOL 2140,4260 r270 top (schematic designator J14)
L1_M0 "BMRF001010401R0MD1" IND_BMRF001010401_PUL-L 5621.51,5372.8 r270 top (schematic designator L1)
L1_M1 "BMRF001010401R0MD1" IND_BMRF001010401_PUL-L 3920.12,5370 r270 top (schematic designator L1)
L1_M2 "BMRF001010401R0MD1" IND_BMRF001010401_PUL-L 2220,5370 r270 top (schematic designator L1)
L2 "CDRH104NP-221MC" IND-4.7UH-0001 7270,5325 r180 top
Q1 "CSD18543Q3AT" FP-DNH0008A-MFG 8545,6141.85 r270 top
Q2_M0 "T2N7002AK,LM" NMOS-SOT23-3 5340,5933.27 r90 top (schematic designator Q2)
Q2_M1 "T2N7002AK,LM" NMOS-SOT23-3 3638.61,5930.47 r90 top (schematic designator Q2)
Q2_M2 "T2N7002AK,LM" NMOS-SOT23-3 1938.49,5930.47 r90 top (schematic designator Q2)
Q3 "T2N7002AK,LM" NMOS-SOT23-3 7305,4730 r180 top
Q4 "T2N7002AK,LM" NMOS-SOT23-3 7125,4730 r180 top
Q5_M0 "CSD17575Q3" NMOS_8VSONCLIP 5266.51,4892.8 r0 top (schematic designator Q5)
Q5_M1 "CSD17575Q3" NMOS_8VSONCLIP 3565.12,4890 r0 top (schematic designator Q5)
Q5_M2 "CSD17575Q3" NMOS_8VSONCLIP 1865,4890 r0 top (schematic designator Q5)
Q6_M0 "CSD17575Q3" NMOS_8VSONCLIP 5821.51,4892.8 r0 top (schematic designator Q6)
Q6_M1 "CSD17575Q3" NMOS_8VSONCLIP 4120.12,4890 r0 top (schematic designator Q6)
Q6_M2 "CSD17575Q3" NMOS_8VSONCLIP 2420,4890 r0 top (schematic designator Q6)
Q7_M0 "CSD17575Q3" NMOS_8VSONCLIP 5220,4645 r0 top (schematic designator Q7)
Q7_M1 "CSD17575Q3" NMOS_8VSONCLIP 3515.12,4655 r0 top (schematic designator Q7)
Q7_M2 "CSD17575Q3" NMOS_8VSONCLIP 1815,4655 r0 top (schematic designator Q7)
Q8_M0 "CSD17575Q3" NMOS_8VSONCLIP 5871.51,4657.8 r0 top (schematic designator Q8)
Q8_M1 "CSD17575Q3" NMOS_8VSONCLIP 4170.12,4655 r0 top (schematic designator Q8)
Q8_M2 "CSD17575Q3" NMOS_8VSONCLIP 2470,4655 r0 top (schematic designator Q8)
R1 "RC0603FR-07200KL" FP-RC0603-0_55-IPC_B 8510,6295 r270 top
R2 "RC0603FR-07100KL" FP-RC0603-0_55-IPC_B 8420,6165 r270 top
R3_M0 "RC0402FR-07240RL" RESC0402(1005)_L 5440,5793.27 r270 top value="240.00 Ohm" (schematic designator R3)
R3_M1 "RC0402FR-07240RL" RESC0402(1005)_L 3738.61,5790.47 r270 top value="240.00 Ohm" (schematic designator R3)
R3_M2 "RC0402FR-07240RL" RESC0402(1005)_L 2038.49,5790.47 r270 top value="240.00 Ohm" (schematic designator R3)
R4_M0 "RC0603FR-072M15L" RESC1608X55N 6131.51,6027.8 r180 top (schematic designator R4)
R4_M1 "RC0603FR-072M15L" RESC1608X55N 4430.12,6025 r180 top (schematic designator R4)
R4_M2 "RC0603FR-072M15L" RESC1608X55N 2730,6025 r180 top (schematic designator R4)
R5_M0 "RC0402FR-071KL" RESC1005X40X25NL05T10 5440,5868.27 r90 top (schematic designator R5)
R5_M1 "RC0402FR-071KL" RESC1005X40X25NL05T10 3738.61,5865.47 r90 top (schematic designator R5)
R5_M2 "RC0402FR-071KL" RESC1005X40X25NL05T10 2038.49,5865.47 r90 top (schematic designator R5)
R6_M0 "RC0603FR-07100KL" FP-RC0603-0_55-IPC_B 6031.51,6057.8 r90 top (schematic designator R6)
R6_M1 "RC0603FR-07100KL" FP-RC0603-0_55-IPC_B 4330.12,6055 r90 top (schematic designator R6)
R6_M2 "RC0603FR-07100KL" FP-RC0603-0_55-IPC_B 2630,6055 r90 top (schematic designator R6)
R7_M0 "RC0402FR-07147KL" RESC1005X40X25NL05T10 5265,6058.27 r90 top (schematic designator R7)
R7_M1 "RC0402FR-07147KL" RESC1005X40X25NL05T10 3563.61,6055.47 r90 top (schematic designator R7)
R7_M2 "RC0402FR-07147KL" RESC1005X40X25NL05T10 1863.49,6055.47 r90 top (schematic designator R7)
R8_M0 "RC0402FR-0760K4L" RESC1005X40X25NL05T10 5515,6066.73 r0 top (schematic designator R8)
R8_M1 "RC0402FR-0760K4L" RESC1005X40X25NL05T10 3813.61,6063.94 r0 top (schematic designator R8)
R8_M2 "RC0402FR-0760K4L" RESC1005X40X25NL05T10 2113.49,6063.94 r0 top (schematic designator R8)
R9_M0 "RC0402FR-07158KL" RESC1005X40X25NL05T10 5865,6048.27 r90 top (schematic designator R9)
R9_M1 "RC0402FR-07158KL" RESC1005X40X25NL05T10 4163.61,6045.47 r90 top (schematic designator R9)
R9_M2 "RC0402FR-07158KL" RESC1005X40X25NL05T10 2463.49,6045.47 r90 top (schematic designator R9)
R10_M0 "RC0402FR-0710K5L" RESC1005X40X25NL05T10 5360,6058.27 r270 top (schematic designator R10)
R10_M1 "RC0402FR-0710K5L" RESC1005X40X25NL05T10 3658.61,6055.47 r270 top (schematic designator R10)
R10_M2 "RC0402FR-0710K5L" RESC1005X40X25NL05T10 1958.49,6055.47 r270 top (schematic designator R10)
R11 "RC0603FR-07100KL" FP-RC0603-0_55-IPC_B 6750,6260 r270 top
R12 "RC0603FR-07100KL" FP-RC0603-0_55-IPC_B 7035,6170 r0 top
R13 "AC0402FR-0715K4L" FP-AC0402-MFG 6790,6160 r0 top
R14 "RC0603FR-074K7L" RESC1608X55X25LL10T15 8250,4665 r180 top
R15 "RC0603FR-074K7L" RESC1608X55X25LL10T15 8050,4735 r180 top
R16 "RC0402FR-07470RL" RESC1005X40X25NL05T10 7325,4815 r180 top
R17 "RC0402FR-07470RL" RESC1005X40X25NL05T10 7145,4815 r180 top
R18 "RC0402FR-07100RL" RESC1005X40X25NL05T10 7390,4715 r90 top
R19 "RC0402FR-07100RL" RESC1005X40X25NL05T10 7210,4715 r90 top
R20 "RC0603FR-074K7L" RESC1608X55X25LL10T15 7000,4720 r90 top
R21 "RC1210FR-07120RL" RESC3126X60X50LL10T20 6860,4580 r180 top
R22_M0 "RC0402FR-7W33RL" RES-0402 4971.51,5282.8 r270 top (schematic designator R22)
R22_M1 "RC0402FR-7W33RL" RES-0402 3270.12,5280 r270 top (schematic designator R22)
R22_M2 "RC0402FR-7W33RL" RES-0402 1570,5280 r270 top (schematic designator R22)
R23_M0 "RC0402FR-7W33RL" RES-0402 5066.51,5357.8 r0 top (schematic designator R23)
R23_M1 "RC0402FR-7W33RL" RES-0402 3365.12,5355 r0 top (schematic designator R23)
R23_M2 "RC0402FR-7W33RL" RES-0402 1665,5355 r0 top (schematic designator R23)
R24_M0 "RC0402FR-7W33RL" RES-0402 6151.51,5339.41 r180 top (schematic designator R24)
R24_M1 "RC0402FR-7W33RL" RES-0402 4450.12,5336.61 r180 top (schematic designator R24)
R24_M2 "RC0402FR-7W33RL" RES-0402 2750,5336.61 r180 top (schematic designator R24)
R25_M0 "RC0402FR-7W33RL" RES-0402 6256.51,5202.8 r270 top (schematic designator R25)
R25_M1 "RC0402FR-7W33RL" RES-0402 4555.12,5200 r270 top (schematic designator R25)
R25_M2 "RC0402FR-7W33RL" RES-0402 2855,5200 r270 top (schematic designator R25)
R26_M0 "ERJ2GEJ1R0X" RES-0402 5166.51,4957.8 r270 top (schematic designator R26)
R26_M1 "ERJ2GEJ1R0X" RES-0402 3465.12,4955 r270 top (schematic designator R26)
R26_M2 "ERJ2GEJ1R0X" RES-0402 1765,4955 r270 top (schematic designator R26)
R27_M0 "ERJ2GEJ1R0X" RES-0402 6066.51,4957.8 r270 top (schematic designator R27)
R27_M1 "ERJ2GEJ1R0X" RES-0402 4365.12,4955 r270 top (schematic designator R27)
R27_M2 "ERJ2GEJ1R0X" RES-0402 2661.51,4954.53 r270 top (schematic designator R27)
R28_M0 "RC0402FR-7W33RL" RES-0402 5286.51,4542.8 r0 top (schematic designator R28)
R28_M1 "RC0402FR-7W33RL" RES-0402 3585.12,4540 r0 top (schematic designator R28)
R28_M2 "RC0402FR-7W33RL" RES-0402 1881.51,4539.53 r0 top (schematic designator R28)
R29_M0 "RC0402FR-7W33RL" RES-0402 5946.51,4547.8 r180 top (schematic designator R29)
R29_M1 "RC0402FR-7W33RL" RES-0402 4245.12,4545 r180 top (schematic designator R29)
R29_M2 "RC0402FR-7W33RL" RES-0402 2545,4545 r180 top (schematic designator R29)
R30_M0 "RC0402FR-7W33RL" RES-0402 5286.51,4587.8 r180 top (schematic designator R30)
R30_M1 "RC0402FR-7W33RL" RES-0402 3585.12,4585 r180 top (schematic designator R30)
R30_M2 "RC0402FR-7W33RL" RES-0402 1885,4585 r180 top (schematic designator R30)
R31_M0 "RC0402FR-7W33RL" RES-0402 5946.51,4587.8 r0 top (schematic designator R31)
R31_M1 "RC0402FR-7W33RL" RES-0402 4245.12,4585 r0 top (schematic designator R31)
R31_M2 "RC0402FR-7W33RL" RES-0402 2545,4585 r0 top (schematic designator R31)
R32_M0 "RC0402FR-07100RL" RESC1005X40X25NL05T10 6276.51,4847.8 r90 top (schematic designator R32)
R32_M1 "RC0402FR-07100RL" RESC1005X40X25NL05T10 4575.12,4845 r90 top (schematic designator R32)
R32_M2 "RC0402FR-07100RL" RESC1005X40X25NL05T10 2875,4845 r90 top (schematic designator R32)
R33_M0 "RC0402FR-07100RL" RESC1005X40X25NL05T10 6276.51,4427.8 r90 top (schematic designator R33)
R33_M1 "RC0402FR-07100RL" RESC1005X40X25NL05T10 4575.12,4425 r90 top (schematic designator R33)
R33_M2 "RC0402FR-07100RL" RESC1005X40X25NL05T10 2875,4425 r90 top (schematic designator R33)
TP3_M0 "5003" TEST-POINT-0001 5620,5095 r90 top (schematic designator TP3)
TP3_M1 "5003" TEST-POINT-0001 3915,5095 r90 top (schematic designator TP3)
TP3_M2 "5003" TEST-POINT-0001 2220,5095 r90 top (schematic designator TP3)
TP8_M0 "5003" TEST-POINT-0001 2060,4510 r90 top (schematic designator TP8)
TP8_M1 "5003" TEST-POINT-0001 3765,4515 r90 top (schematic designator TP8)
TP8_M2 "5003" TEST-POINT-0001 5460,4515 r90 top (schematic designator TP8)
TP9_M0 "5003" TEST-POINT-0001 2370,4510 r90 top (schematic designator TP9)
TP9_M1 "5003" TEST-POINT-0001 4065,4510 r90 top (schematic designator TP9)
TP9_M2 "5003" TEST-POINT-0001 5770,4515 r90 top (schematic designator TP9)
U1_M0 "TPS54561DPRR" FP-DPR0010A-MFG 5735,5963.27 r180 top (schematic designator U1)
U1_M1 "TPS54561DPRR" FP-DPR0010A-MFG 4033.61,5960.47 r180 top (schematic designator U1)
U1_M2 "TPS54561DPRR" FP-DPR0010A-MFG 2333.49,5960.47 r180 top (schematic designator U1)
U2 "LMR36510FADDAR" DDA0008J 6860,6020 r180 top
U3 "UA78M05IDCYR" FP-DCY0004A-IPC_B 7155,5055 r270 top
U4 "UA78M33CDCYR" VREG_UA78M33CDCYR 7605,5410 r0 top
U5 "STM32G431CBT6" LQFP48-7x7mm 8170,5075 r180 top
U6 "TCAN1042HDRQ1" D0008A_N 6860,4790 r270 top
VBAT "5003" TEST-POINT-0001 8270,6490 r0 top (schematic designator TP1)

## Footprints (in the part's own frame and the unit in brackets; to place one, negate y for a bottom-side part, rotate by r counter-clockwise, add the part's x,y. Pads: shape width x height; smd on the part's side, far side on the other; paste and mask are expansions set on the pad)
43045-0412 [mm]
  round 1.02 hole 1.02 unplated: 1(-4.5,3.94) 1(4.5,3.94)
  rect 1.482x1.482 / inner rect 1.524x1.524 / far side rect 1.482x1.482 hole 1.02: P$1(1.5,0)
  round 1.53 / inner round 1.524 / far side round 1.53 hole 1.02: P$2(-1.5,0) P$3(1.5,3) P$4(-1.5,3)
  body extent -5.07,-2.45 5.08,6.32, height 10.03
43045-0612 [mm]
  round 1.02 hole 1.02 unplated: 1(-6,3.94) 1(6,3.94)
  rect 1.482x1.482 / inner rect 1.524x1.524 / far side rect 1.482x1.482 hole 1.02: P$1(3,0)
  round 1.53 / inner round 1.524 / far side round 1.53 hole 1.02: P$2(0,0) P$3(-3,0) P$4(3,3) P$5(0,3) P$6(-3,3)
  body extent -6.57,-2.45 6.58,6.32, height 10.03
61300311121 [mm] "Pin Header, pitch 2.54 mm, THT, Vertical, single row, 3p"
  rrect50% 1.6x1.6 hole 1.1: 1(-2.54,0)
  round 1.6 hole 1.1: 2(0,0) 3(2.54,0)
  silkscreen extent -4.53,-1.34 3.96,1.34, body extent -3.81,-1.27 3.81,1.27, height 8.57
CAP-0603 [mm]
  rect 1.15x1.1 smd: 1(-0.8,0) 2(0.8,0)
  body extent -0.8,-0.45 0.8,0.45, height 0.8
CAP_CC0603_YAG [mil]
  rect 32x35 smd paste+0 mask+0: 1(-25.5,0) 2(25.5,0)
  Layer 1 keep-out region: -7.5,-15.5 -7.5,15.5 7.5,15.5 7.5,-15.5
  Keep-Out Layer region: -7.5,-17.5 -7.5,17.5 7.5,17.5 7.5,-17.5
  body extent -34,-17 34,17, height 35
CAP_CC0805_YAG-L [mil]
  rect 36x55 smd paste+0 mask+0: 1(-31.31,0) 2(31.31,0)
  Layer 1 keep-out region: -11.31,-26.5 -11.31,26.5 11.31,26.5 11.31,-26.5
  Keep-Out Layer region: -11.31,-28.5 -11.31,28.5 11.31,28.5 11.31,-28.5
  silkscreen extent -85,-3 -79,3, body extent -43,-29 43,29, height 57
CAP_EEETK2A101AM [mm]
  rect 6.5x2.5 smd: 1(-6.25,0) 2(6.25,0)
  silkscreen extent -9.75,-8.5 8.5,8.5, body extent -9.2,-8.5 9.2,8.5, height 16.5
CAPC1005X55N [mm]
  rect 0.51x0.6 smd: 1(-0.445,0) 2(0.445,0)
CAPC1608X90 [mm]
  rect 1.1x1 smd: 1(-0.85,0) 2(0.85,0)
  silkscreen extent -0.15,-0.45 0.15,0.45
CON_430450212_MOL [mm]
  rect 1.52x1.52 / inner round 1.524 / far side rect 1.52x1.52 hole 1.02 paste-2539.97 mask+0.076: 1(0,0)
  round 1.52 / inner round 1.524 / far side round 1.52 hole 1.02 paste-2539.97 mask+0.076: 2(0,3)
  round 1.02 / inner round 1.524 / far side round 1.02 hole 1.02 unplated paste-2539.97 mask+0.076: M1(3,3.94) M2(-3,3.94)
  silkscreen extent -3.57,-2.47 5.35,6.3
CON_436500215_MOL [mm]
  rect 1.52x1.52 / inner round 1.524 / far side rect 1.52x1.52 hole 1.02 paste-2539.97 mask+0.076: 1(0,0)
  round 1.52 / inner round 1.524 / far side round 1.52 hole 1.02 paste-2539.97 mask+0.076: 2(-3,0)
  round 1.27 / inner round 1.524 / far side round 1.27 hole 1.27 unplated paste-2539.97 mask+0.076: M1(3,-1.96) M2(-6,-1.96)
  silkscreen extent -6.33,-2.47 5.1,3.1
D0008A_N [mm] "SOIC, 8-Leads, Body 5x4mm, Pitch 1.27mm, IPC Medium Density"
  rrect17% 1.45x0.6 smd: 1(-2.725,1.905) 2(-2.725,0.635) 3(-2.725,-0.635) 4(-2.725,-1.905) 5(2.725,-1.905) 6(2.725,-0.635) 7(2.725,0.635) 8(2.725,1.905)
  silkscreen extent -2.85,-2.5 1.6,2.88, body extent -3,-2.45 3,2.45, height 1.63
DDA0008J [mm]
  rect 1.55x0.6 smd paste+0 mask+0.051: 1(-2.7,1.905) 2(-2.7,0.635) 3(-2.7,-0.635) 4(-2.7,-1.905) 5(2.7,-1.905) 6(2.7,-0.635) 7(2.7,0.635) 8(2.7,1.905)
  rect 2.95x4.9 smd paste-2.437 mask-2.438: 9(0,0)
  round 0.5 / inner round 1.524 / far side round 0.5 hole 0.203 paste-2539.97 mask+0.051: 10(-0.65,0.65) 11(0.65,0.65) 12(-0.65,-0.65) 13(0.65,-0.65) 14(-0.65,-1.95) 15(0.65,-1.95) 16(-0.65,1.95) 17(0.65,1.95)
  silkscreen extent -3.47,-2.55 1.58,2.55
DIO-SOD128 [mm]
  rect 2x1.4 smd: 1(0,2.2) 2(0,-2.2)
  silkscreen extent -1.02,-1.14 1.02,-1.14, body extent -1.25,-2.35 1.25,2.35, height 1.05
DIOD-POWERDI5-3_V [mm] "SMD, 3-Leads, Body 3.975x5.375mm, Pitch 1.84mm"
  rect 1.4x1.39 smd: 1(-2.856,0.92) 2(-2.856,-0.92)
  rect 4.86x3.36 smd: 3(1.126,0)
  silkscreen extent -4.23,0.8 -3.98,1.04, body extent -2.69,-1.99 2.69,1.99, height 1.15
"DO-214AA (SMBJ)" [mm]
  rect 2.16x2.26 smd: 1(-2.416,0) 2(2.484,0)
  body extent -2.72,-1.95 2.78,1.95, height 2.45
FP-0155-MFG [mil]
  rect 167x150 smd paste+0 mask+0: 1(-125.5,0) 2(125.5,0)
  silkscreen extent -192,-99 192,99, body extent -213,-103 213,103, height 10
FP-AC0402-MFG [mm]
  rect 0.5x0.6 smd paste+0 mask+0: 1(-0.5,0) 2(0.5,0)
  silkscreen extent -0.5,-0.67 0.5,0.67, body extent -0.85,-0.4 0.85,0.4, height 0.25
FP-CC0402-IPC_B [mil]
  rect 22.37x22.54 smd paste+0 mask+0: 1(-17.8,0) 2(17.8,0)
  silkscreen extent -29,-27 29,27, body extent -35,-17 35,17, height 10
FP-CC0603-DA-MFG [mm]
  rect 0.8x0.9 smd paste+0 mask+0: 1(-0.75,0) 2(0.75,0)
  silkscreen extent -0.85,-0.85 0.85,0.85, body extent -1.35,-0.75 1.35,0.75, height 0.25
FP-CC0603-DC-MFG [mm]
  rect 0.8x0.9 smd paste+0 mask+0: 1(-0.75,0) 2(0.75,0)
  silkscreen extent -0.85,-0.87 0.85,0.87, body extent -1.43,-0.82 1.43,0.82, height 0.25
FP-CC0805-0_85-MFG [mm]
  rect 0.95x1.4 smd paste+0 mask+0: 1(-0.925,0) 2(0.925,0)
  silkscreen extent -0.07,-0.73 0.07,0.73, body extent -1.6,-1.05 1.6,1.05, height 0.25
FP-CC1206-0_3-1_9-IPC_B [mil]
  rect 55.25x74.97 smd paste+0 mask+0: 1(-55.13,0) 2(55.13,0)
  silkscreen extent -16,-37 16,37, body extent -93,-47 93,47, height 10
FP-CL32-IPC_B [mil]
  rect 65.06x110.4 smd paste+0 mask+0: 1(-52.17,0) 2(52.18,0)
  silkscreen extent -8,-55 8,55, body extent -95,-65 95,65, height 10
FP-DCY0004A-IPC_B [mm]
  rect 1.754x0.913 smd paste+0 mask+0: 1(-3.125,2.3)
  rrect100% 1.754x0.913 smd paste+0 mask+0: 2(-3.125,0) 3(-3.125,-2.3)
  rrect52% 1.754x3.172 smd paste+0 mask+0: 2(3.125,0)
  silkscreen extent -5.15,-3.25 1.6,3.25, body extent -4.25,-3.5 4.25,3.5, height 0.25
FP-DNH0008A-MFG [mm]
  rrect50% 0.7x0.4 smd paste-1000 mask-1000: 1(-1.55,-0.975) 2(-1.55,0.975) 2(-1.55,-0.325) 2(-1.55,0.325)
  rrect8% 2.51x2.55 smd paste-1000 mask-1000: 3(0.645,0)
  silkscreen extent -2.57,-1.73 1.55,1.73, body extent -2,-1.88 2,1.88, height 0.25
FP-DPR0010A-MFG [mm]
  round 0.315 smd paste-1000 mask+0: 1(-1.993,1.6) 2(-1.993,0.8) 3(-1.993,0) 4(-1.975,-0.8) 5(-1.975,-1.6) 6(1.993,-1.6) 7(1.993,-0.8) 8(1.993,0) 9(1.975,0.8) 10(1.975,1.6)
  rect 2.6x3 smd paste-1000 mask+0: 11(0,0)
  Layer 1 region: -2.4,1.775 -1.725,1.775 -1.658,1.762 -1.601,1.724 -1.563,1.667 -1.55,1.6 -1.55,1.6 -1.563,1.533 -1.601,1.476 -1.658,1.438 -1.725,1.425 -1.725,1.425 -2.4,1.425
  Layer 1 region: -2.4,0.975 -1.725,0.975 -1.658,0.962 -1.601,0.924 -1.563,0.867 -1.55,0.8 -1.55,0.8 -1.563,0.733 -1.601,0.676 -1.658,0.638 -1.725,0.625 -1.725,0.625 -2.4,0.625
  Layer 1 region: -2.4,0.175 -1.725,0.175 -1.658,0.162 -1.601,0.124 -1.563,0.067 -1.55,0 -1.55,0 -1.563,-0.067 -1.601,-0.124 -1.658,-0.162 -1.725,-0.175 -1.725,-0.175 -2.4,-0.175
  Layer 1 region: -2.4,-0.625 -1.725,-0.625 -1.658,-0.638 -1.601,-0.676 -1.563,-0.733 -1.55,-0.8 -1.55,-0.8 -1.563,-0.867 -1.601,-0.924 -1.658,-0.962 -1.725,-0.975 -1.725,-0.975 -2.4,-0.975
  Layer 1 region: -2.4,-1.425 -1.725,-1.425 -1.658,-1.438 -1.601,-1.476 -1.563,-1.533 -1.55,-1.6 -1.55,-1.6 -1.563,-1.667 -1.601,-1.724 -1.658,-1.762 -1.725,-1.775 -1.725,-1.775 -2.4,-1.775
  Layer 1 region: 2.4,-1.775 1.725,-1.775 1.658,-1.762 1.601,-1.724 1.563,-1.667 1.55,-1.6 1.55,-1.6 1.563,-1.533 1.601,-1.476 1.658,-1.438 1.725,-1.425 1.725,-1.425 2.4,-1.425
  Layer 1 region: 2.4,-0.975 1.725,-0.975 1.658,-0.962 1.601,-0.924 1.563,-0.867 1.55,-0.8 1.55,-0.8 1.563,-0.733 1.601,-0.676 1.658,-0.638 1.725,-0.625 1.725,-0.625 2.4,-0.625
  Layer 1 region: 2.4,-0.175 1.725,-0.175 1.658,-0.162 1.601,-0.124 1.563,-0.067 1.55,0 1.55,0 1.563,0.067 1.601,0.124 1.658,0.162 1.725,0.175 1.725,0.175 2.4,0.175
  Layer 1 region: 2.4,0.625 1.725,0.625 1.658,0.638 1.601,0.676 1.563,0.733 1.55,0.8 1.55,0.8 1.563,0.867 1.601,0.924 1.658,0.962 1.725,0.975 1.725,0.975 2.4,0.975
  Layer 1 region: 2.4,1.425 1.725,1.425 1.658,1.438 1.601,1.476 1.563,1.533 1.55,1.6 1.55,1.6 1.563,1.667 1.601,1.724 1.658,1.762 1.725,1.775 1.725,1.775 2.4,1.775
  silkscreen extent -3.1,-2.05 1.18,2.05, body extent -2.5,-2.15 2.5,2.15, height 0.25
FP-GRM32-MFG [mm]
  rect 1.1x2.05 smd paste+0 mask+0: 1(-1.65,0) 2(1.65,0)
  silkscreen extent -0.73,-1.35 0.73,1.35, body extent -2.3,-1.45 2.3,1.45, height 0.25
FP-GRM216-0_1-IPC_B [mil]
  rect 45.58x53.57 smd paste+0 mask+0: 1(-32.57,0) 2(32.57,0)
  silkscreen extent -55,-43 55,43, body extent -65,-37 65,37, height 10
FP-OS-CON-SMT-B45-MFG [mm]
  rect 3x1.6 smd paste+0 mask+0: 1(-2.2,0) 2(2.2,0)
  silkscreen extent -4.37,-2.75 2.75,2.75, body extent -3.95,-3 3.95,3, height 0.25
FP-RC0603-0_55-IPC_B [mil]
  rect 33.81x35.91 smd paste+0 mask+0: 1(-30.58,0) 2(30.58,0)
  silkscreen extent -47,-34 47,34, body extent -57,-28 57,28, height 10
FUS_VISHAY_MFU0603_VIS [mil]
  rect 27.5x37 smd paste+0 mask+0: 1(-26.75,0) 2(26.75,0)
  Layer 1 keep-out region: -11,-16.5 -11,16.5 11,16.5 11,-16.5
  silkscreen extent -73,-3 -68,3, body extent -31,-19 31,19, height 22
IC-8PowerSOIC [mm]
  rrect50% 0.5x2.2 smd mask+0.07: 1(-1.8,-2.875) 2(-0.53,-2.875) 3(0.74,-2.875) 5(2.01,2.875) 6(0.74,2.875) 7(-0.53,2.875) 8(-1.8,2.875)
  rrect50% 0.45x2.2 smd mask+0.07: 4(2.01,-2.875)
  rrect50% 3.1x2.4 smd: 9(0,0)
  silkscreen extent -2.92,-4.7 -2.67,-4.45, body extent -2.35,-3 2.55,3, height 1.7
IC-10POWERSOIC [mm]
  rect 0.8x0.3 smd paste+0 mask+0.051: 1(0.353,-0.461) 2(0.353,-0.961) 3(0.353,-1.461) 4(0.353,-1.961) 5(0.353,-2.461) 6(3.353,-2.461) 7(3.353,-1.961) 8(3.353,-1.461) 9(3.353,-0.961) 10(3.353,-0.461)
  oval 1.52x3.42 smd: 11(1.854,-1.47)
  Layer 1 region: 1.094,-0.27 1.454,-0.27 1.454,0.245 1.754,0.245 1.754,-0.27 1.954,-0.27 1.954,0.245 2.254,0.245 2.254,-0.27 2.614,-0.27 2.614,-2.67 2.254,-2.67 2.254,-3.175 1.954,-3.175 1.954,-2.67 1.754,-2.67 1.754,-3.175 1.454,-3.175 1.454,-2.67 1.094,-2.67 1.094,-0.575 1.094,-0.575 1.094,-0.575 1.094,-0.575 1.094,-0.27
  silkscreen extent -0.13,-2.96 3.35,0.14
IND-4.7UH-0001 [mm]
  rect 4x6.5 smd paste+0 mask+0.051: 1(13,-6.731) 2(2,-6.731)
  silkscreen extent 1.02,-13.21 13.98,-0.25
IND_BMRF001010401_PUL-L [mil]
  rect 126x116 smd paste+0 mask+0: 1(-173.5,0) 2(173.5,0)
  silkscreen extent -224,-210 224,210, body extent -229,-204 229,204, height 157
LED0603-R-RD [mm]
  rect 0.8x0.8 smd: 1(2.291,0.751) 2(0.589,0.751)
  silkscreen extent 0,0 2.88,1.5
LQFP48-7x7mm [mil]
  rect 47x12 smd paste+0 mask+0: 1(-167.32,108.27) 2(-167.32,88.58) 3(-167.32,68.9) 4(-167.32,49.21) 5(-167.32,29.53) 6(-167.32,9.84) 7(-167.32,-9.84) 8(-167.32,-29.53) 9(-167.32,-49.21) 10(-167.32,-68.9) 11(-167.32,-88.58) 12(-167.32,-108.27) 25(167.32,-108.27) 26(167.32,-88.58) 27(167.32,-68.9) 28(167.32,-49.21) 29(167.32,-29.53) 30(167.32,-9.84) 31(167.32,9.84) 32(167.32,29.53) 33(167.32,49.21) 34(167.32,68.9) 35(167.32,88.58) 36(167.32,108.27)
  rect 12x47 smd paste+0 mask+0: 13(-108.27,-167.32) 14(-88.58,-167.32) 15(-68.9,-167.32) 16(-49.21,-167.32) 17(-29.53,-167.32) 18(-9.84,-167.32) 19(9.84,-167.32) 20(29.53,-167.32) 21(49.21,-167.32) 22(68.9,-167.32) 23(88.58,-167.32) 24(108.27,-167.32) 37(108.27,167.32) 38(88.58,167.32) 39(68.9,167.32) 40(49.21,167.32) 41(29.53,167.32) 42(9.84,167.32) 43(-9.84,167.32) 44(-29.53,167.32) 45(-49.21,167.32) 46(-68.9,167.32) 47(-88.58,167.32) 48(-108.27,167.32)
  silkscreen extent -214,-211 211,211, body extent -177,-177 177,177, height 63
NMOS-SOT23-3 [mm]
  rect 0.6x0.7 smd: 1(-0.95,-1) 2(0.95,-1) 3(0,1)
  body extent -1.46,-1.18 1.46,1.19, height 1.12
NMOS_8VSONCLIP [mm]
  rect 0.4x0.7 smd paste-100 mask+0.05: 1(2.812,0.877) 2(0.862,0.877) 2(1.512,0.877) 2(2.162,0.877) 3(0.862,4.077) 3(1.512,4.077) 3(2.162,4.077) 3(2.812,4.077)
  rect 2.45x1.9 smd paste-100 mask+0.05: 3(1.837,2.917)
  silkscreen extent 0.19,0.13 3.49,4.18
RES-0402 [mm]
  rect 0.6x0.7 smd: 1(-0.5,0) 2(0.5,0)
  body extent -0.5,-0.25 0.5,0.25, height 0.3
RESC0402(1005)_L [mm] "Chip Resistor, Body 1.0x0.5mm, IPC High Density"
  rect 0.45x0.55 smd: 1(-0.45,0) 2(0.45,0)
  body extent -0.52,-0.27 0.53,0.28, height 0.4
RESC1005X40X25NL05T10 [mm] "Chip Resistor, 2-Leads, Body 1.00x0.50mm, IPC Medium Density"
  rect 0.6x0.55 smd: 1(-0.425,0) 2(0.425,0)
  body extent -0.53,-0.27 0.53,0.28, height 0.4
RESC1608X55N [mm]
  rect 0.79x0.93 smd: 1(-0.82,0) 2(0.82,0)
  silkscreen extent -0.11,-0.45 0.11,0.45
RESC1608X55X25LL10T15 [mm] "Chip Resistor, 2-Leads, Body 1.60x0.80mm, IPC High Density"
  rect 0.6x0.8 smd: 1(-0.65,0) 2(0.65,0)
  body extent -0.85,-0.45 0.85,0.45, height 0.55
RESC3126X60X50LL10T20 [mm] "Chip Resistor, 2-Leads, Body 3.10x2.60mm, IPC High Density"
  rect 0.95x2.6 smd: 1(-1.275,0) 2(1.275,0)
  silkscreen extent -0.4,-1.2 0.4,1.2, body extent -1.6,-1.35 1.6,1.35, height 0.6
SMB [mil]
  rect 91x89 smd paste+0 mask+0: 1(-78.5,0) 2(78.5,0)
  Layer 1 keep-out region: -31,-76 -31,76 31,76 31,-76
  Keep-Out Layer region: -31,-76 -31,76 31,76 31,-76
  silkscreen extent -199,-83 96,83, body extent -110,-78 110,78, height 104
TEST-POINT-0001 [mm] "2024 miniature test point"
  round 1.3 hole 1: 1(0,0)
  body extent -1.27,-1.27 1.27,1.27, height 4.57
VREG_UA78M33CDCYR [mm]
  rect 2.15x0.95 smd: 1(-2.9,2.3) 2(-2.9,0) 3(-2.9,-2.3)
  rect 2.15x3.25 smd: 2(2.9,0)
  silkscreen extent -4.7,-3.25 1.75,3.25, body extent -3.5,-3.25 3.5,3.25, height 1.8